# Altium PCB PCB1.PcbDoc
Units mm, origin at the board's own origin, x right, y up, seen from the top; angles counter-clockwise.
Board outline 23.6 x 22.5 mm, 2 copper layers (Top Layer, Bottom Layer); 11 components, 13 nets, 57 pads, 24 vias.
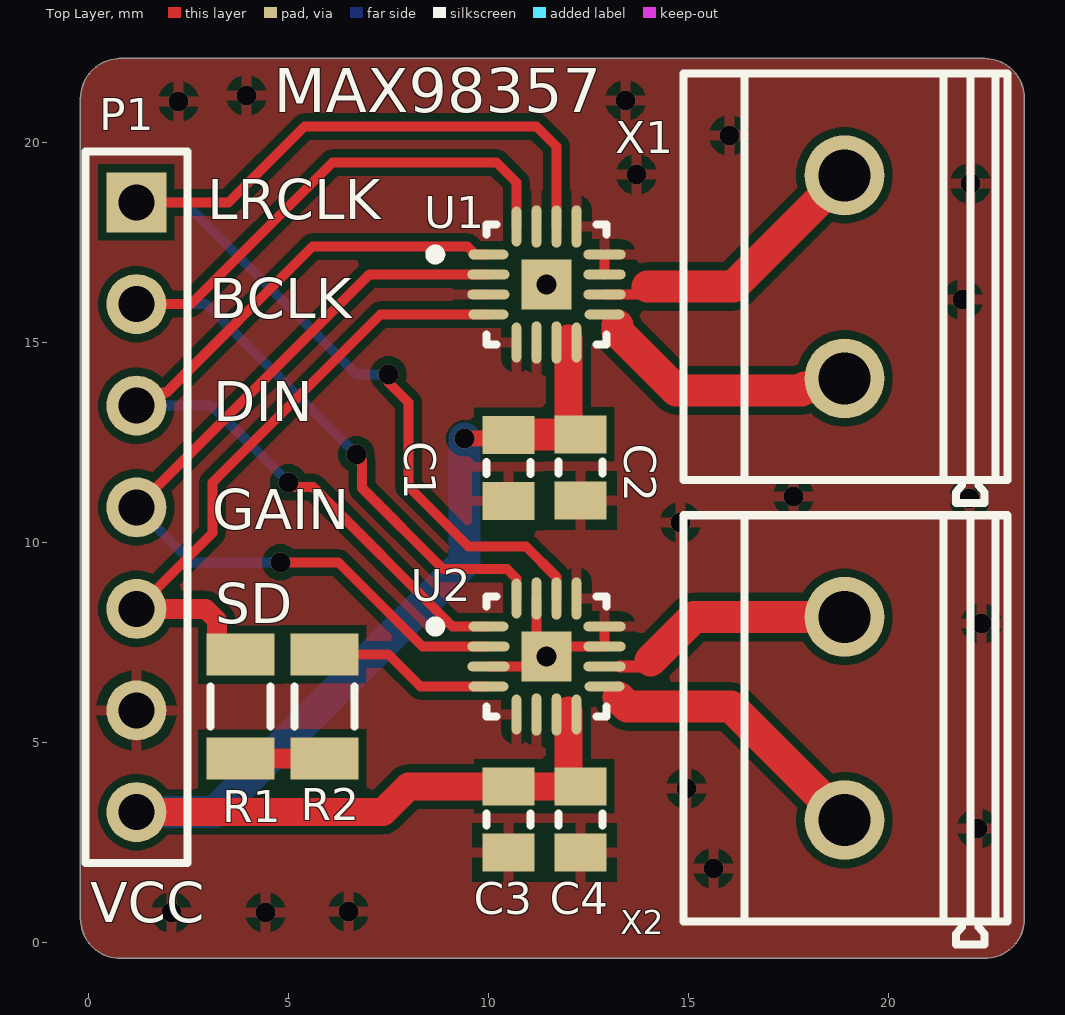
[diagram p0: Top Layer view]
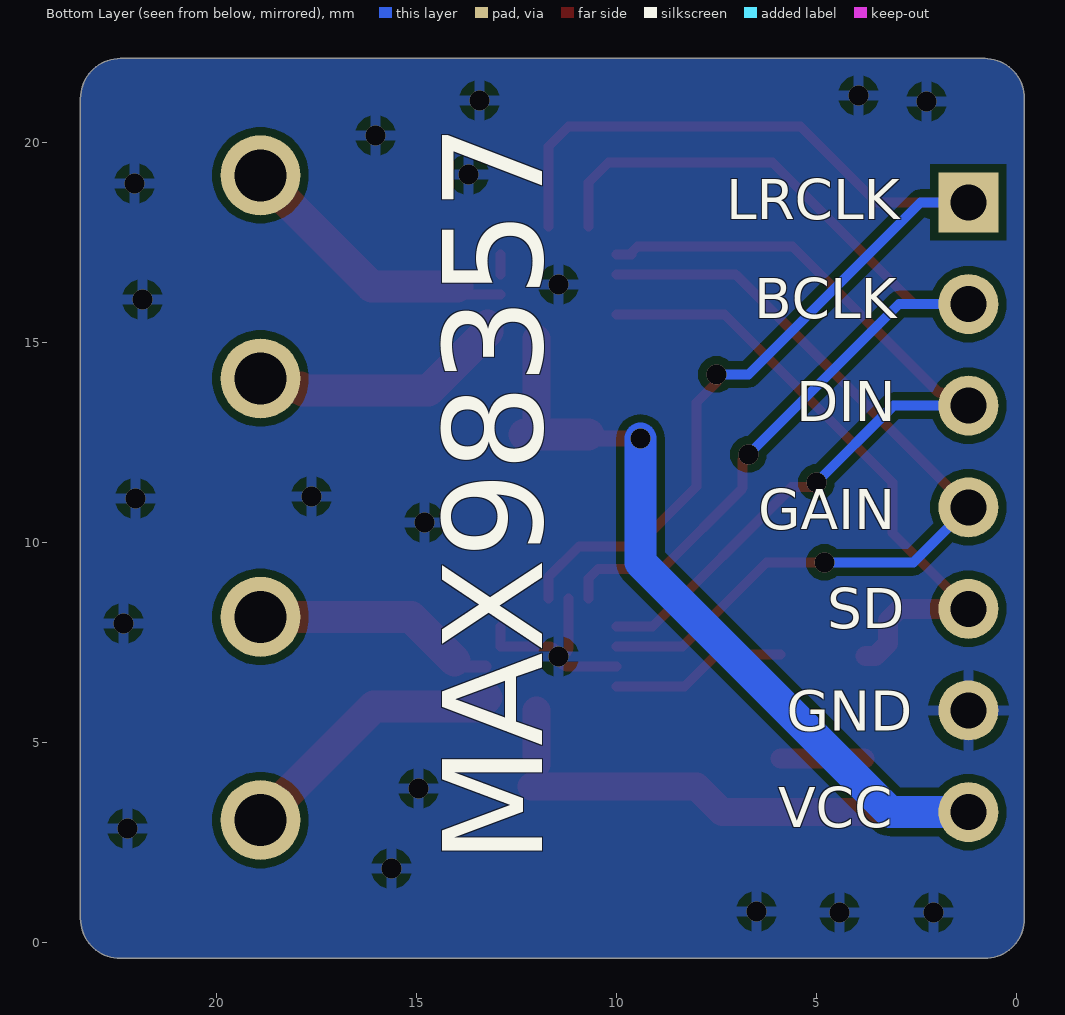
[diagram p1: Bottom Layer view, seen from below]
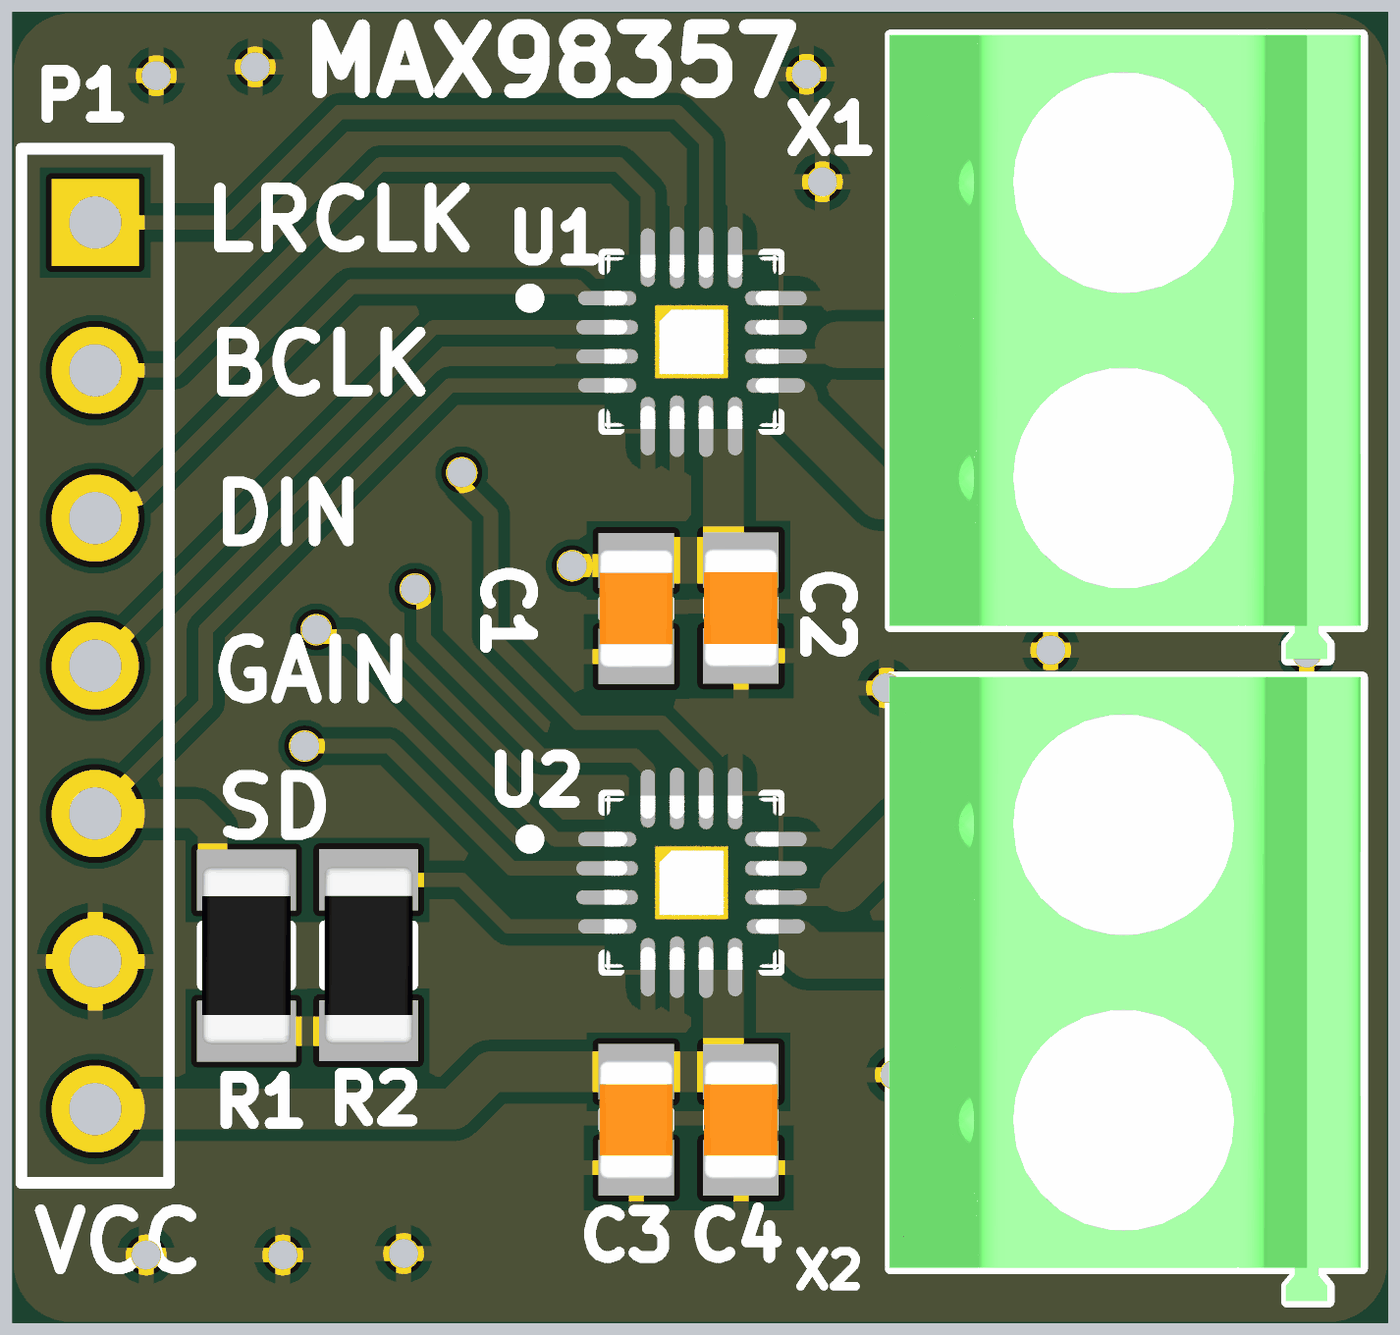
[diagram p2: 3D render of the assembled board from above, using the file's embedded part models]

## Layer stack, top to bottom
Top Solder: solder mask 0.0102, Solder Resist, Dk 3.5
Top Layer: signal copper 0.0356
Dielectric 1: dielectric 0.32, FR-4, Dk 4.8
Bottom Layer: signal copper 0.0356
Bottom Solder: solder mask 0.0102, Solder Resist, Dk 3.5

## Board outline
-0.2,0.6 -0.2,21.1 cw(c0.8,21.1) 0.8,22.1 0.775,22.1 22.4,22.1 cw(c22.4,21.1) 23.4,21.1 23.4,0.6 cw(c22.4,0.6) 22.4,-0.4 0.8,-0.4 cw(c0.8,0.6)

## Design rules (kind name [scope] priority, off if disabled: settings)
Clearance [All] p1: gap=0.2 ignorepadtopadclearanceinfootprint=FALSE
PolygonConnect PolygonConnect_1 [All vs IsNamedPolygon('GND TOP')] p1: thpad.connectstyle=Relief thpad.reliefconductorwidth=0.254 thpad.reliefentries=4 thpad.polygonreliefangle="90 Angle" thpad.airgapwidth=0.254 smdpad.connectstyle=Direct smdpad.reliefconductorwidth=0.254 smdpad.reliefentries=4 smdpad.polygonreliefangle="90 Angle" smdpad.airgapwidth=0.254 via.connectstyle=Direct via.reliefconductorwidth=0.254 via.reliefentries=4 via.polygonreliefangle="90 Angle" via.airgapwidth=0.254
PolygonConnect [All] p2: connectstyle=Relief reliefconductorwidth=0.254 reliefentries=4 polygonreliefangle="90 Angle" airgapwidth=0.254
RoutingVias [All] p1: holewidth=0.711 width=1.27 viastyle="Through Hole" minholewidth=0.3 minwidth=1 maxholewidth=0.711 maxwidth=1.27
SolderMaskExpansion [All] p1: expansion=0.102 istentingtop=FALSE
Width [All] p1: maxlimit=1 minlimit=0.2 preferedwidth=0.25 minimp=50.000000 maximp=50.000000 favimp=50.000000
30 further rules are at their usual default settings.

## Components (designator, comment, footprint, x,y, rotation, side; value= is the part's Value field where it differs from the comment)
C1 "10u" "CAP 0805" 10.5,11.8 r270 top
C2 "100nf" "CAP 0805" 12.3,11.811 r270 top
C3 "10u" "CAP 0805" 10.5,3.011 r270 top
C4 "100nf" "CAP 0805" 12.3,3.011 r270 top
P1 "Header 7" HDR1X7 1.2,18.5 r270 top
R1 "100K" "RES 1206 (3216X08L)" 3.8,5.9 r270 top
R2 "100K" "RES 1206 (3216X08L)" 5.9,5.9 r90 top
U1 "" FP-T1633-4-IPC_A 11.449,16.45 r0 top
U2 "" FP-T1633-4-IPC_A 11.45,7.149 r0 top
X1 "CON_Phoenix_MKDSN_02" CON_MKDSN1,5/2-5,08 18.9,16.64 r90 top
X2 "CON_Phoenix_MKDSN_02" CON_MKDSN1,5/2-5,08 18.9,5.6 r90 top

## Footprints (in the part's own frame and the unit in brackets; to place one, negate y for a bottom-side part, rotate by r counter-clockwise, add the part's x,y. Pads: shape width x height; smd on the part's side, far side on the other; paste and mask are expansions set on the pad)
"CAP 0805" [mm]
  rect 0.95x1.3 smd: 1(-0.889,0) 2(0.761,0)
  silkscreen extent -0.21,-0.55 0.09,0.55, body extent -1.08,-0.63 0.95,0.63, height 0.65
CON_MKDSN1,5/2-5,08 [mm]
  round 2 hole 1.3: 1(-2.54,0) 2(2.54,0)
  silkscreen extent -5.65,-4.07 5.08,4.03, body extent -5.64,-4.05 5.09,4.05, height 10.03
FP-T1633-4-IPC_A [mm]
  oval 1x0.242 smd paste+0 mask+0: 1(-1.451,0.75)
  rrect100% 1.057x0.242 smd paste+0 mask+0: 2(-1.451,0.25) 3(-1.451,-0.25) 10(1.451,-0.25) 11(1.451,0.25) 12(1.451,0.75)
  rrect100% 1x0.242 smd paste+0 mask+0: 4(-1.451,-0.75) 9(1.451,-0.75)
  rrect100% 0.242x1 smd paste+0 mask+0: 5(-0.75,-1.451) 8(0.75,-1.451) 16(-0.75,1.451)
  rrect100% 0.242x1.057 smd paste+0 mask+0: 6(-0.25,-1.451) 7(0.25,-1.451) 13(0.75,1.451) 14(0.25,1.451) 15(-0.25,1.451)
  rect 1.25x1.25 smd paste-1000 mask+0: 17(0,0)
  silkscreen extent -2.9,-1.5 1.5,1.5, body extent -2.48,-2.48 2.48,2.48, height 0.25
HDR1X7 [mm] "Connector; Header; 7 Position"
  rect 1.5x1.5 hole 0.9: 1(0,0)
  round 1.5 hole 0.9: 2(2.54,0) 3(5.08,0) 4(7.62,0) 5(10.16,0) 6(12.7,0) 7(15.24,0)
  silkscreen extent -1.27,-1.27 16.51,1.27
"RES 1206 (3216X08L)" [mm] "Chip Resistor, 2-Leads, Body 3.2x1.6mm, IPC High Density _ (0.125 W)"
  rect 1.05x1.7 smd: 1(-1.295,0) 2(1.301,0)
  silkscreen extent -0.5,-0.75 0.5,0.75, body extent -1.52,-0.76 1.53,0.76, height 0.6

## Part data
C1 C2 C3 C4: library part Capacitor, "Capacitor"
P1: "Header, 7-Pin", LatestRevisionDate=17-Jul-2002, LatestRevisionNote="Re-released for DXP Platform.", Publisher="Altium Limited"
R1 R2: library part Resistor, "Resistor", Power="1/4 W", Tolerance=5%
U1 U2: library part CMP-05698-000018-1, "IC AMP CLASS D MONO 3.2W 16TQFN", Max Operating Temperature=85°C, Max Output Current=1.6A, Max Output Power=3.2W, Max Power Dissipation=1.666W, Max Supply Voltage=5.5V, Min Operating Temperature=-40°C, Min Supply Voltage=2.5V, Power Supply Rejection Ratio (PSRR)=77dB, Voltage Gain=15dB, Contact Plating=Tin, Mount="Surface Mount", Number of Pins=16, Packaging="Tape and Reel", Radiation Hardening=No, RoHS Compliant=Yes, Series=-
X1 X2: Manufacturer="PHOENIX CONTACT", Max Current="13.5 A", Voltage="400 V", Category=Connector, Company="SJ Libraries", ComponentLink1Description=Datasheet, ComponentLink2Description=Reference, Connector type="PCB Terminal Block", designer="Eng. Saeid Jorablo", HelpURL=http://s3.picofile.com/file/7443264187/Coming_Soon_logo.gif, Mounting Technology=Through-Hole, Pin Count=2, Positions=2, Publisher="SJ UnLimited", Revision 1="2012/10/1 : Adding Model", Status=Unreleased, Update=2012/10/1

## Via types
v1: diameter 0.5, hole 0.5, Top Layer to Bottom Layer, 24 vias

## Nets (pads, with @x,y where several pads share a name; then routed paths per layer and width w, separated by ;. In a path a pad name is that pad's centre, name@x,y a point inside that pad or via, vN(x,y) a via of type N, cw(c..) or ccw(c..) an arc to the next point about the centre after c; other vN are vias at no path point)
BCLK: P1.2 U1.16 U2.16 | length 25.5
  Top Layer w0.25: P1.2 2.56,15.96 6.1,19.5 10.2,19.5 10.7,19 U1.16@10.7,17.901 ; v1(6.7,12.2) 6.844,12.056 6.844,11.357 8.864,9.336 10.464,9.336 10.7,9.1 U2.16
  Bottom Layer w0.25: P1.2 2.94,15.96 v1(6.7,12.2)
DIN: P1.3 U1.1 U2.1 | length 21.6
  Top Layer w0.25: P1.3 1.538,13.42 1.874,13.755 1.955,13.755 5.6,17.4 9.474,17.4 9.624,17.25 9.624,17.204 9.995,17.204 U1.1 ; v1(5,11.5) 5.119,11.381 5.619,11.381 9.101,7.899 U2.1
  Bottom Layer w0.25: P1.3 3.08,13.42 v1(5,11.5)
GAIN: P1.4 U1.2 U2.2 | length 21.5
  Top Layer w0.25: P1.4 7.02,16.7 U1.2 ; v1(4.8,9.5) 6.249,9.5 8.35,7.399 U2.2
  Bottom Layer w0.25: P1.4 2.58,9.5 v1(4.8,9.5)
GND: C1.2 C2.2 C3.2 C4.2 P1.6 U1.3 U1.5 U1.6 U1.11 U1.12 U1.13 U1.15 U1.17 U2.3 U2.5 U2.6 U2.11 U2.12 U2.13 U2.15 U2.17 | length 5.8
  Top Layer w0.25: U2.3 11.2,6.899 ccw(c11.2,7.149) v1(11.45,7.149) ; U2.15 11.2,7.399 ccw(c11.45,7.399) v1(11.45,7.149) ; U2.12 U2.11 11.7,7.399 ccw(c11.7,7.149) v1(11.45,7.149) ; U1.11 U1.12
  other v1: 2.075,0.75 4.425,0.75 6.5,0.775 15.625,1.85 22.225,2.85 14.95,3.85 22.325,7.975 14.8,10.5 22.025,11.1 17.625,11.15 21.85,16.075 11.449,16.45 22.05,18.975 13.7,19.2 16.025,20.175 2.25,21.025 13.425,21.05 3.95,21.175
LEFTN: U1.10 X1.2 | length 7
  Top Layer w0.25: U1.10 13.772,16.2
  Top Layer w0.8: 13.972,16.4 16.12,16.4 X1.2
LEFTP: U1.9 X1.1 | length 6.6
  Top Layer w0.8: 13.225,15.425 13.225,15.275 14.7,13.8 17.831,13.8 17.902,13.87 18.67,13.87 X1.1
LRCLK: P1.1 U1.14 U2.14 | length 29.8
  Top Layer w0.25: P1.1 3.5,18.5 5.4,20.4 11.2,20.4 11.7,19.9 U1.14@11.7,17.901 ; v1(7.5,14.2) 7.5,13.997 8,13.497 8,11.4 9.5,9.9 10.938,9.9 11.696,9.142 11.696,8.604 U2.14
  Bottom Layer w0.25: P1.1 2.4,18.5 6.7,14.2 v1(7.5,14.2)
NetR1_2: R1.2 R2.1 | length 2.1
  Top Layer w0.254: R2.1 R2.1@5.904,4.601
  Top Layer w0.5: R1.2 3.802,4.597 5.898,4.597 R2.1@5.9,4.595
NetR2_2: R2.2 U2.4 | length 4.4
  Top Layer w0.25: R2.2 7.499,7.201 8.3,6.4 U2.4@9.999,6.4
RIGHTN: U2.10 X2.2 | length 6
  Top Layer w0.3: U2.10@13.279,6.9 14.019,6.9
  Top Layer w0.8: 14.05,7.05 15.14,8.14 X2.2
RIGHTP: U2.9 X2.1 | length 6.9
  Top Layer w0.8: 13.25,6.125 13.475,5.9 16.06,5.9 X2.1
SD: P1.5 R1.1 U1.4 | length 16
  Top Layer w0.25: P1.5 3.1,10.24 3.1,11.5 7.3,15.7 U1.4
  Top Layer w0.254: R1.1@3.772,7.168 R1.1
  Top Layer w0.5: P1.5 2.923,8.34 3.216,8.047 3.216,7.47 3.519,7.168 R1.1@3.772,7.168
VCC: C1.1 C2.1 C3.1 C4.1 P1.7 U1.7 U1.8 U2.7 U2.8 | length 31.8
  Top Layer w0.25: C1.1@10.411,12.6 ccw(c10.411,12.689) C1.1
  Top Layer w0.4: v1(9.4,12.6) C1.1@10.411,12.6
  Top Layer w0.7: P1.7 7.36,3.26 8,3.9 C3.1 ; C3.1@10.525,3.9 C4.1@12.125,3.9 ; 12,4.435 12,5.8 ; 12,15.1 12,12.825 12.125,12.7 C2.1
  Top Layer w0.8: C1.1@10.694,12.695 C2.1@12.294,12.695
  Bottom Layer w0.8: P1.7 3.16,3.26 9.4,9.5 v1(9.4,12.6)

## Polygon pours and split planes (outlines as drawn)
GND on Bottom Layer "GND_L02_P003" (solid, remove dead copper, pour order 3): -0.2,21.1 cw(c0.8,21.1) 0.8,22.1 22.4,22.1 cw(c22.4,21.1) 23.4,21.1 23.4,0.6 cw(c22.4,0.6) 22.4,-0.4 0.8,-0.4 cw(c0.8,0.6) -0.2,0.6
GND on Top Layer "GND TOP" (solid, remove dead copper, pour order 0): -0.2,21.1 cw(c0.8,21.1) 0.8,22.1 22.4,22.1 cw(c22.4,21.1) 23.4,21.1 23.4,0.6 cw(c22.4,0.6) 22.4,-0.4 0.8,-0.4 cw(c0.8,0.6) -0.2,0.6

## Silkscreen, mask and mechanical layers (free items; w line width, h text height)
Top Overlay:
  text "MAX98357" at 4.629,20.754 h1.1
  text "LRCLK" at 2.975,18.075 h1
  text "BCLK" at 3.025,15.6 h1
  text "DIN" at 3.125,13.025 h1
  text "GAIN" at 3.1,10.325 h1
  text "SD" at 3.175,7.975 h1
  text "VCC" at 0.038,0.508 h1
Bottom Overlay:
  text "LRCLK" at 7.25,18.075 h1
  text "BCLK" at 6.55,15.6 h1
  text "DIN" at 5.5,13.025 h1
  text "GAIN" at 6.45,10.325 h1
  text "SD" at 4.725,7.85 h1
  text "GND" at 5.742,5.292 h1
  text "VCC" at 5.95,2.875 h1
  text "MAX98357" at 11.854,1.954 h2.5 r270
Mechanical 1:
  lines w0.254: 0.775,22.1 22.4,22.1 cw(c22.4,21.1) 23.4,21.1 ; 0.8,22.1 ccw(c0.8,21.1) -0.2,21.1 -0.2,0.6 ccw(c0.8,0.6) 0.8,-0.4 22.4,-0.4 ccw(c22.4,0.6) 23.4,0.6 23.4,21.075